# Altium PCB KNX_POE.PcbDoc
Units mm, origin at the board's own origin, x right, y up, seen from the top; angles counter-clockwise.
Board outline 41.5 x 56.2 mm, 2 copper layers (Top Layer, Bottom Layer); 14 components, 8 nets, 33 pads, 59 vias.
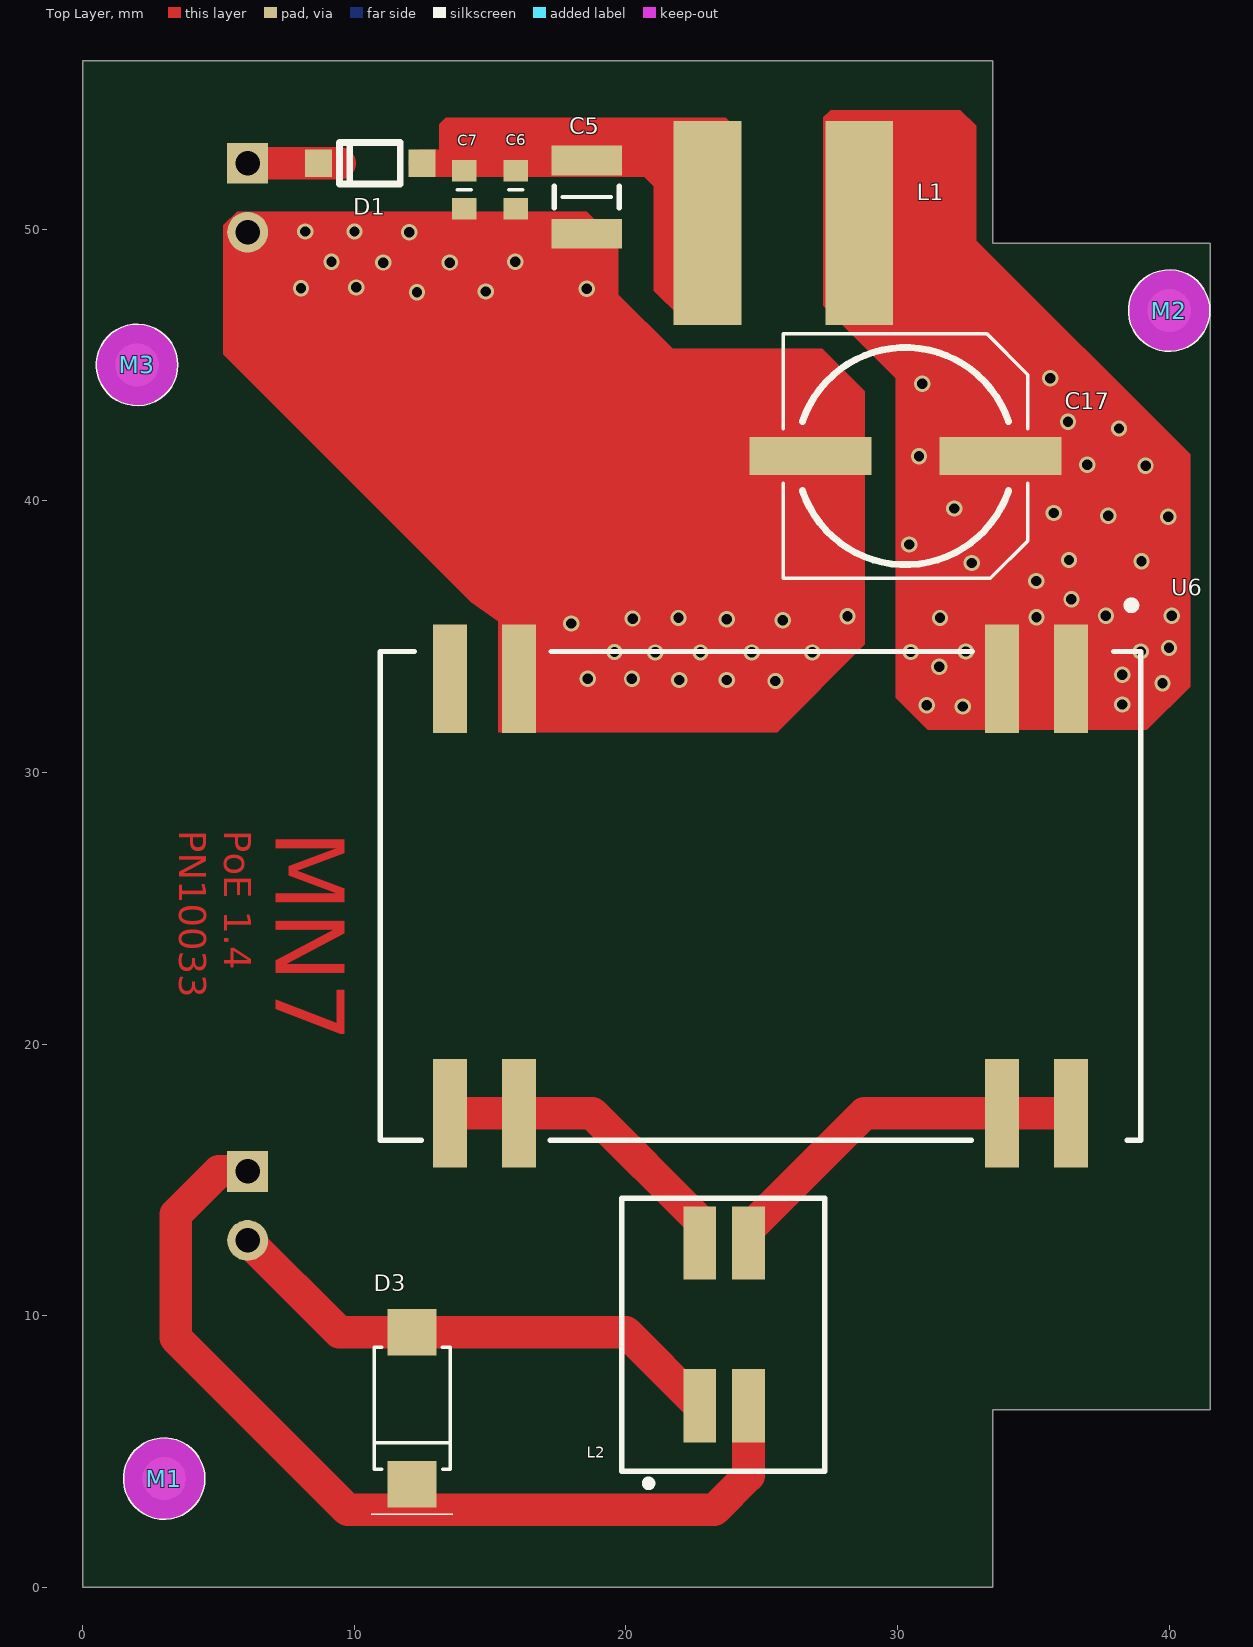
[diagram p0: Top Layer view]
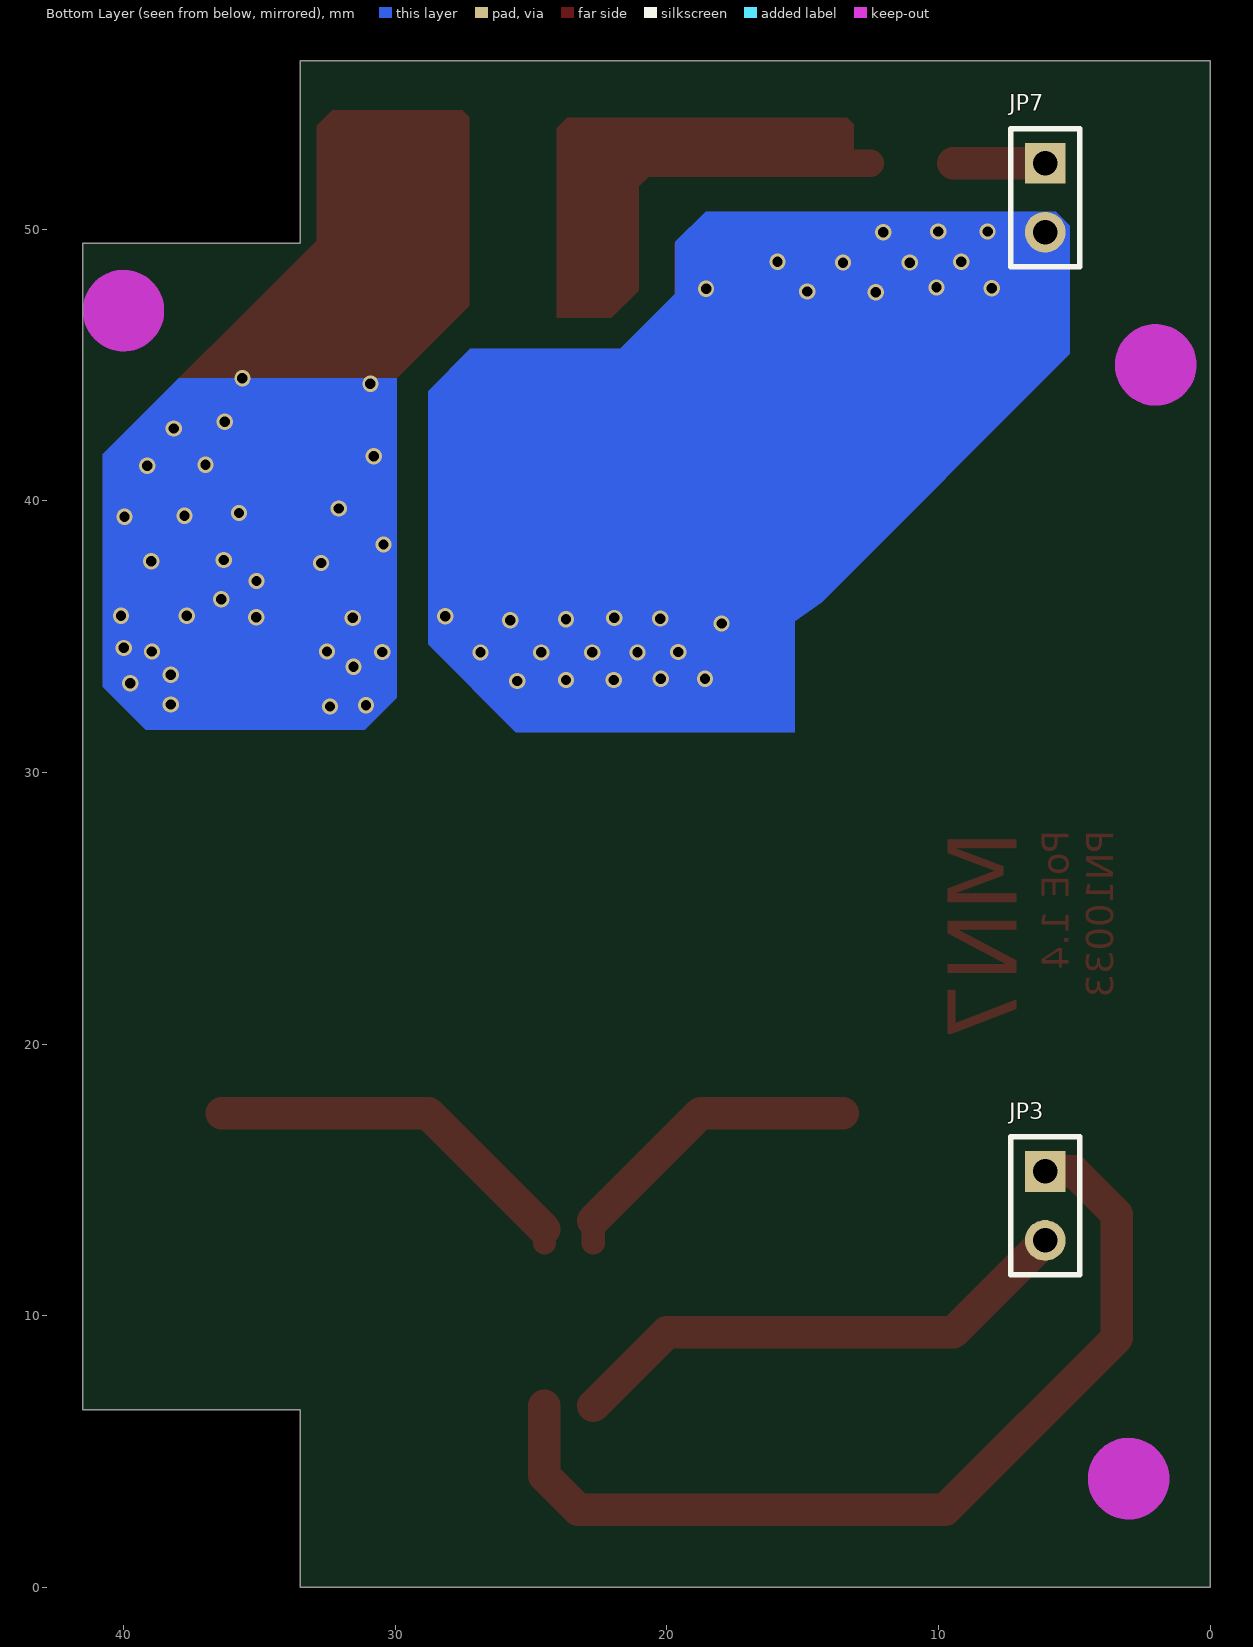
[diagram p1: Bottom Layer view, seen from below]
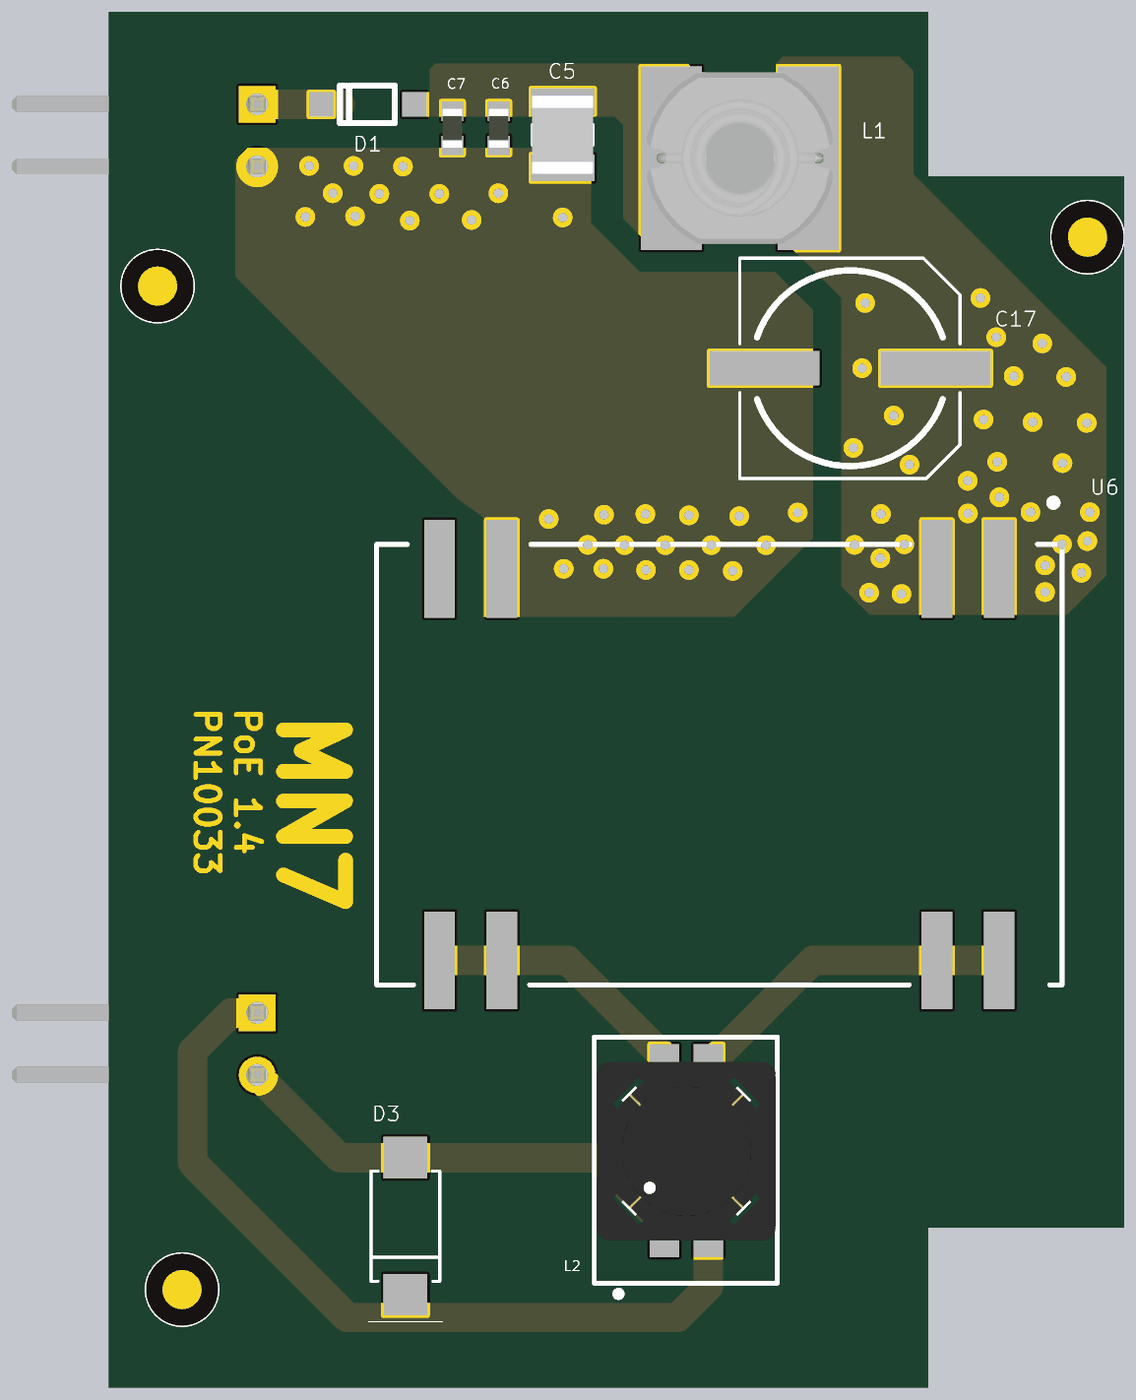
[diagram p2: 3D render of the assembled board from above, using the file's embedded part models]

## Layer stack, top to bottom
Top Solder: solder mask 0.0102, Solder Resist, Dk 3.5
Top Layer: signal copper 0.0356
Dielectric 1: dielectric 0.32, FR-4, Dk 4.8
Bottom Layer: signal copper 0.0356
Bottom Solder: solder mask 0.0102, Solder Resist, Dk 3.5

## Board outline
0,0 0,56.2 33.503,56.2 33.503,49.48 41.504,49.48 41.504,6.538 33.503,6.538 33.503,0

## Design rules (kind name [scope] priority, off if disabled: settings)
Clearance [All] p1: gap=0.12
ComponentClearance [All] p1: gap=0 collisioncheckmode=3 verticalgap=0 showdistances=TRUE
MinimumSolderMaskSliver [All] p1: minsoldermaskwidth=0.1
PolygonConnect [All] p1: connectstyle=Relief reliefconductorwidth=0.254 reliefentries=4 polygonreliefangle="90 Angle" airgapwidth=0.254
RoomDefinition KNX_POE [InComponentClass('KNX_POE')] p1: confinementstyle=ConfineIn formatcopy=TRUE lockcomponents=FALSE outline -23.978,-1.089 42.164,-1.089 42.164,57.204 -23.978,57.204
RoutingVias [All] p1: holewidth=0.711 width=1.27 viastyle="Through Hole" minholewidth=0.3 minwidth=0.4 maxholewidth=0.711 maxwidth=1.27
SilkToBoardRegionClearance [(HasFootprint('Mark-3mm') AND IsEmbeddedBoard)] p1:
SilkToSolderMaskClearance [IsPad] p1: minsilkscreentomaskgap=0.04 clearancetoexposedcopper=TRUE
SolderMaskExpansion [All] p1: expansion=0.102
Width [All] p1: maxlimit=2 minlimit=0.254 preferedwidth=0.85
26 further rules are at their usual default settings.

## Components (designator, comment, footprint, x,y, rotation, side; value= is the part's Value field where it differs from the comment)
C5 "10uF50V_1210" C1210 18.555,51.181 r270 top
C6 "1nF200V_0603" C0603 15.938,51.448 r270 top
C7 "10pF50V_0603" C0603 14.046,51.448 r270 top
C17 "470uF25V_POL_FT" Panasonic-FT-F_Case 30.29,41.643 r0 top
D1 "RB160M-30TR" SOD123 10.592,52.426 r180 top
D3 "SMAJ58A-E3/61" DO214A 12.128,6.591 r270 top
JP3 "Plug_2_90_2.54" HDR1X2-down 6.071,14.039 r270 bottom
JP7 "Plug_2_90_2.54" HDR1X2-down 6.071,51.159 r270 bottom
L1 "10uH2A" WE-PD2_1 25.794,50.228 r180 top
L2 "1000R1A-SCC" WE-SCC_7345 23.609,9.677 r0 top
M1 "Paste Mark" Mark-3mm 3,4 r0 top
M2 "Paste Mark" Mark-3mm 40,47 r0 top
M3 "Paste Mark" Mark-3mm 2,45 r0 top
U6 "AG-9812M" Ag9812M 24.956,25.451 r180 top

## Footprints (in the part's own frame and the unit in brackets; to place one, negate y for a bottom-side part, rotate by r counter-clockwise, add the part's x,y. Pads: shape width x height; smd on the part's side, far side on the other; paste and mask are expansions set on the pad)
Ag9812M [mm] "Silvertel, Ag9812M"
  rect 1.25x4 smd: 1(-11.43,-8) 1(-8.89,-8) 2(8.89,-8) 3(11.43,-8) 4(8.89,8) 4(11.43,8) 5(-11.43,8) 5(-8.89,8)
  silkscreen extent -14,-10.84 14,9, body extent -14,-9 14,9, height 12
C0603 [mm] "Chip Capacitor, 0603"
  rect 0.8x0.9 smd: 1(-0.7,0) 2(0.7,0)
  silkscreen extent 0,-0.25 0,0.25, body extent -0.8,-0.4 0.8,0.4, height 0.8
C1210 [mm] "Chip Capacitor, Body 3.2x2.5mm, IPC High Density"
  rect 1.1x2.6 smd: 1(-1.35,0) 2(1.35,0)
  silkscreen extent -0.4,-1.2 0.4,1.2, body extent -1.6,-1.25 1.6,1.25, height 1.35
DO214A [mm] "Diode; 2 Leads"
  rect 1.7x1.8 smd: 1(2.8,0) 2(-2.8,0)
  silkscreen extent -2.25,-1.5 3.9,1.5, body extent -2.25,-1.4 2.25,1.4, height 2.3
HDR1X2-down [mm] "Connector; Header; 2 Position"
  rect 1.5x1.5 hole 0.9: 1(-1.27,0)
  round 1.5 hole 0.9: 2(1.27,0)
  silkscreen extent -2.54,-1.27 2.54,1.27, body extent -2.55,-0.33 2.53,10.03, height 2.57
Mark-3mm [mm]
  round 1.6 smd paste-2: 0(0,0)
  Keep-Out Layer circle w2: c0,0 r0.5
  silkscreen extent -1.5,-1.5 1.5,1.5
Panasonic-FT-F_Case [mm] "SMD electrolytic, Panasonic"
  rect 4.5x1.4 smd: 1(3.5,0) 2(-3.5,0)
  silkscreen extent -4.5,-4.5 4.5,4.5, body extent -4.5,-4.5 4.5,4.5, height 10.4
SOD123 [mm]
  rect 1x1 smd: 1(1.905,0) 2(-1.905,0)
  silkscreen extent -1.1,-0.76 1.14,0.76, body extent -1.4,-0.85 1.4,0.88, height 1.4
WE-PD2_1 [mm]
  rect 2.5x7.5 smd: 1(-2.794,0) 2(2.794,0)
  body extent -3.82,-3.5 3.81,3.5, height 5
WE-SCC_7345 [mm]
  rect 1.2x2.7 smd: 1(-0.9,-3) 2(0.9,-3) 3(0.9,3) 4(-0.9,3)
  silkscreen extent -3.76,-5.97 3.71,4.64, body extent -3.65,-3.67 3.65,3.63, height 5.8

## Part data
C5: "AVX,  X7R, 10%, 50V"
C6: "MLCC series, X7R, 10%, 200V"
C7: "AVX ,  +-0.5pF, 50V"
C17: "Panasonic, FT series"
D1: "Diode Schottky,2A,40V"
D3: "TVS, 400W, 58V"
JP3 JP7: "Plug, 2-Pin"
L1: library part 10uH2A_WE-PD2, "WE-PD2, 10uH2A"
L2: "Common mode choke"
M1 M2 M3: library part Mark
U6: "PoE, 12V"

## Via types
v1: diameter 0.6, hole 0.381, Top Layer to Bottom Layer, 59 vias

## Nets (pads, with @x,y where several pads share a name; then routed paths per layer and width w, separated by ;. In a path a pad name is that pad's centre, name@x,y a point inside that pad or via, vN(x,y) a via of type N, cw(c..) or ccw(c..) an arc to the next point about the centre after c; other vN are vias at no path point)
GND: C5.2 C6.2 C7.2 C17.2 JP7.2 U6.2 | length 43
  Top Layer w1: JP7.2 18.497,49.889 C5.2 18.555,33.493 v1(18.597,33.451) ; U6.2 v1(18.597,33.451) ; C17.2 v1(18.597,33.451)
  other v1: 25.502,33.363 21.958,33.401 23.711,33.401 20.218,33.452 19.576,34.43 21.082,34.417 22.746,34.417 24.625,34.417 26.86,34.417 17.983,35.484 25.768,35.598 23.711,35.636 20.244,35.662 21.933,35.687 28.156,35.75 12.306,47.676 14.834,47.701 18.555,47.803 8.039,47.828 10.071,47.854 11.062,48.768 13.513,48.768 9.157,48.793 15.926,48.793 12.027,49.886 8.191,49.911 10.008,49.911
NetC5_1: C5.1 C6.1 C7.1 D1.2 L1.2 | length 11.6
  Top Layer w1: D1.2 21.069,52.426 23,50.495 L1.2
NetC17_1: C17.1 L1.1 U6.1 | length 21.5
  Top Layer w1: L1.1 28.588,46.845 C17.1 33.846,41.587 33.846,33.451 U6.1@36.386,33.451
  other v1: 32.398,32.423 31.077,32.474 38.265,32.499 39.751,33.287 38.265,33.591 31.534,33.884 30.48,34.43 32.512,34.451 38.955,34.451 39.992,34.582 31.559,35.687 35.115,35.712 37.668,35.763 40.094,35.763 36.398,36.373 35.103,37.046 32.728,37.706 38.976,37.77 36.309,37.821 30.429,38.392 39.967,39.408 37.757,39.446 35.75,39.548 32.08,39.713 39.129,41.288 36.982,41.326 30.789,41.643 38.151,42.659 36.271,42.913 30.912,44.31 35.623,44.513
NetD1_1: D1.1 JP7.1 | length 3.4
  Top Layer w1.2: JP7.1 9.461,52.429
NetD3_1: D3.1 JP3.1 L2.2 | length 34.6
  Top Layer w1.2: JP3.1 5.009,15.309 3.429,13.729 3.429,9.182 9.754,2.857 23.254,2.857 24.509,4.113 L2.2
NetD3_2: D3.2 JP3.2 L2.1 | length 19.2
  Top Layer w1.2: JP3.2 9.449,9.391 D3.2 19.995,9.391 L2.1
NetL2_3: L2.3 U6.5 | length 14.1
  Top Layer w0.85: L2.3 L2.3@24.509,13.181
  Top Layer w1.2: L2.3@24.509,13.181 28.779,17.451 33.846,17.451 U6.5@36.386,17.451
NetL2_4: L2.4 U6.4 | length 11.6
  Top Layer w0.85: L2.4 L2.4@22.709,13.498
  Top Layer w1.2: U6.4@13.525,17.451 16.066,17.451 18.757,17.451 L2.4@22.709,13.498
pads on no net: M1.0 M2.0 M3.0 U6.3

## Other copper
Top Layer:
  region net GND: 15.291,31.483 25.565,31.483 28.791,34.709 28.791,44.031 27.229,45.593 21.717,45.593 19.723,47.587 19.723,49.479 18.555,50.648 5.69,50.648 5.182,50.14 5.182,45.39 14.3,36.271 15.291,35.573
  region net NetC5_1: 24.044,46.728 22.042,46.728 21.031,47.739 21.031,51.575 20.637,51.968 13.119,51.968 13.119,53.861 13.36,54.102 23.664,54.102 24.05,53.717
  region net NetC17_1: 31.115,31.572 29.934,32.753 29.934,44.513 27.267,47.18 27.267,54.115 27.534,54.381 32.309,54.381 32.893,53.797 32.893,49.581 40.767,41.707 40.767,33.16 39.179,31.572
  text "PN10033" at 3.556,27.867 h1 r270
  text "PoE 1.4" at 5.207,27.867 h1 r270
  text "MN7" at 7.112,27.867 h2.54 r270
Bottom Layer:
  region net GND: 15.291,31.483 25.565,31.483 28.791,34.709 28.791,44.031 27.229,45.593 21.717,45.593 19.685,47.625 19.685,49.53 18.567,50.648 5.69,50.648 5.169,50.127 5.169,45.403 14.3,36.271 15.291,35.573
  region net NetC17_1: 31.115,31.572 29.934,32.753 29.934,44.513 37.96,44.513 40.767,41.707 40.767,33.16 39.179,31.572

## Silkscreen, mask and mechanical layers (free items; w line width, h text height)
Top Solder:
  text "PN10033" at 3.543,27.867 h1 r270
  text "PoE 1.4" at 5.194,27.867 h1 r270
  text "MN7" at 7.112,27.867 h2.54 r270
Outline:
  the board outline again, w0.254

## Dimensions
0,0 to 33.503,0 on Mechanical 16
41.504,6.538 to 41.504,49.48 on Mechanical 16
33.503,-0.18 to 41.504,6.538 on Mechanical 16
33.503,-0.2 to 41.504,6.538 on Mechanical 16
33.503,56.2 to 41.504,49.48 on Mechanical 16
0,56.2 to 0,0 on Mechanical 16